# Altium PCB TVC Flight Computer.PcbDoc
Units mil, origin at the board's own origin, x right, y up, seen from the top; angles counter-clockwise.
Board outline 1480 x 1480 mil, 4 copper layers (Top Layer, Plane (GND), Plane (VCC), Bottom Layer), stack 62.992 mil thick; 32 components, 27 nets, 201 pads, 42 vias.
Unrouted connection lines stored in the file: 2.
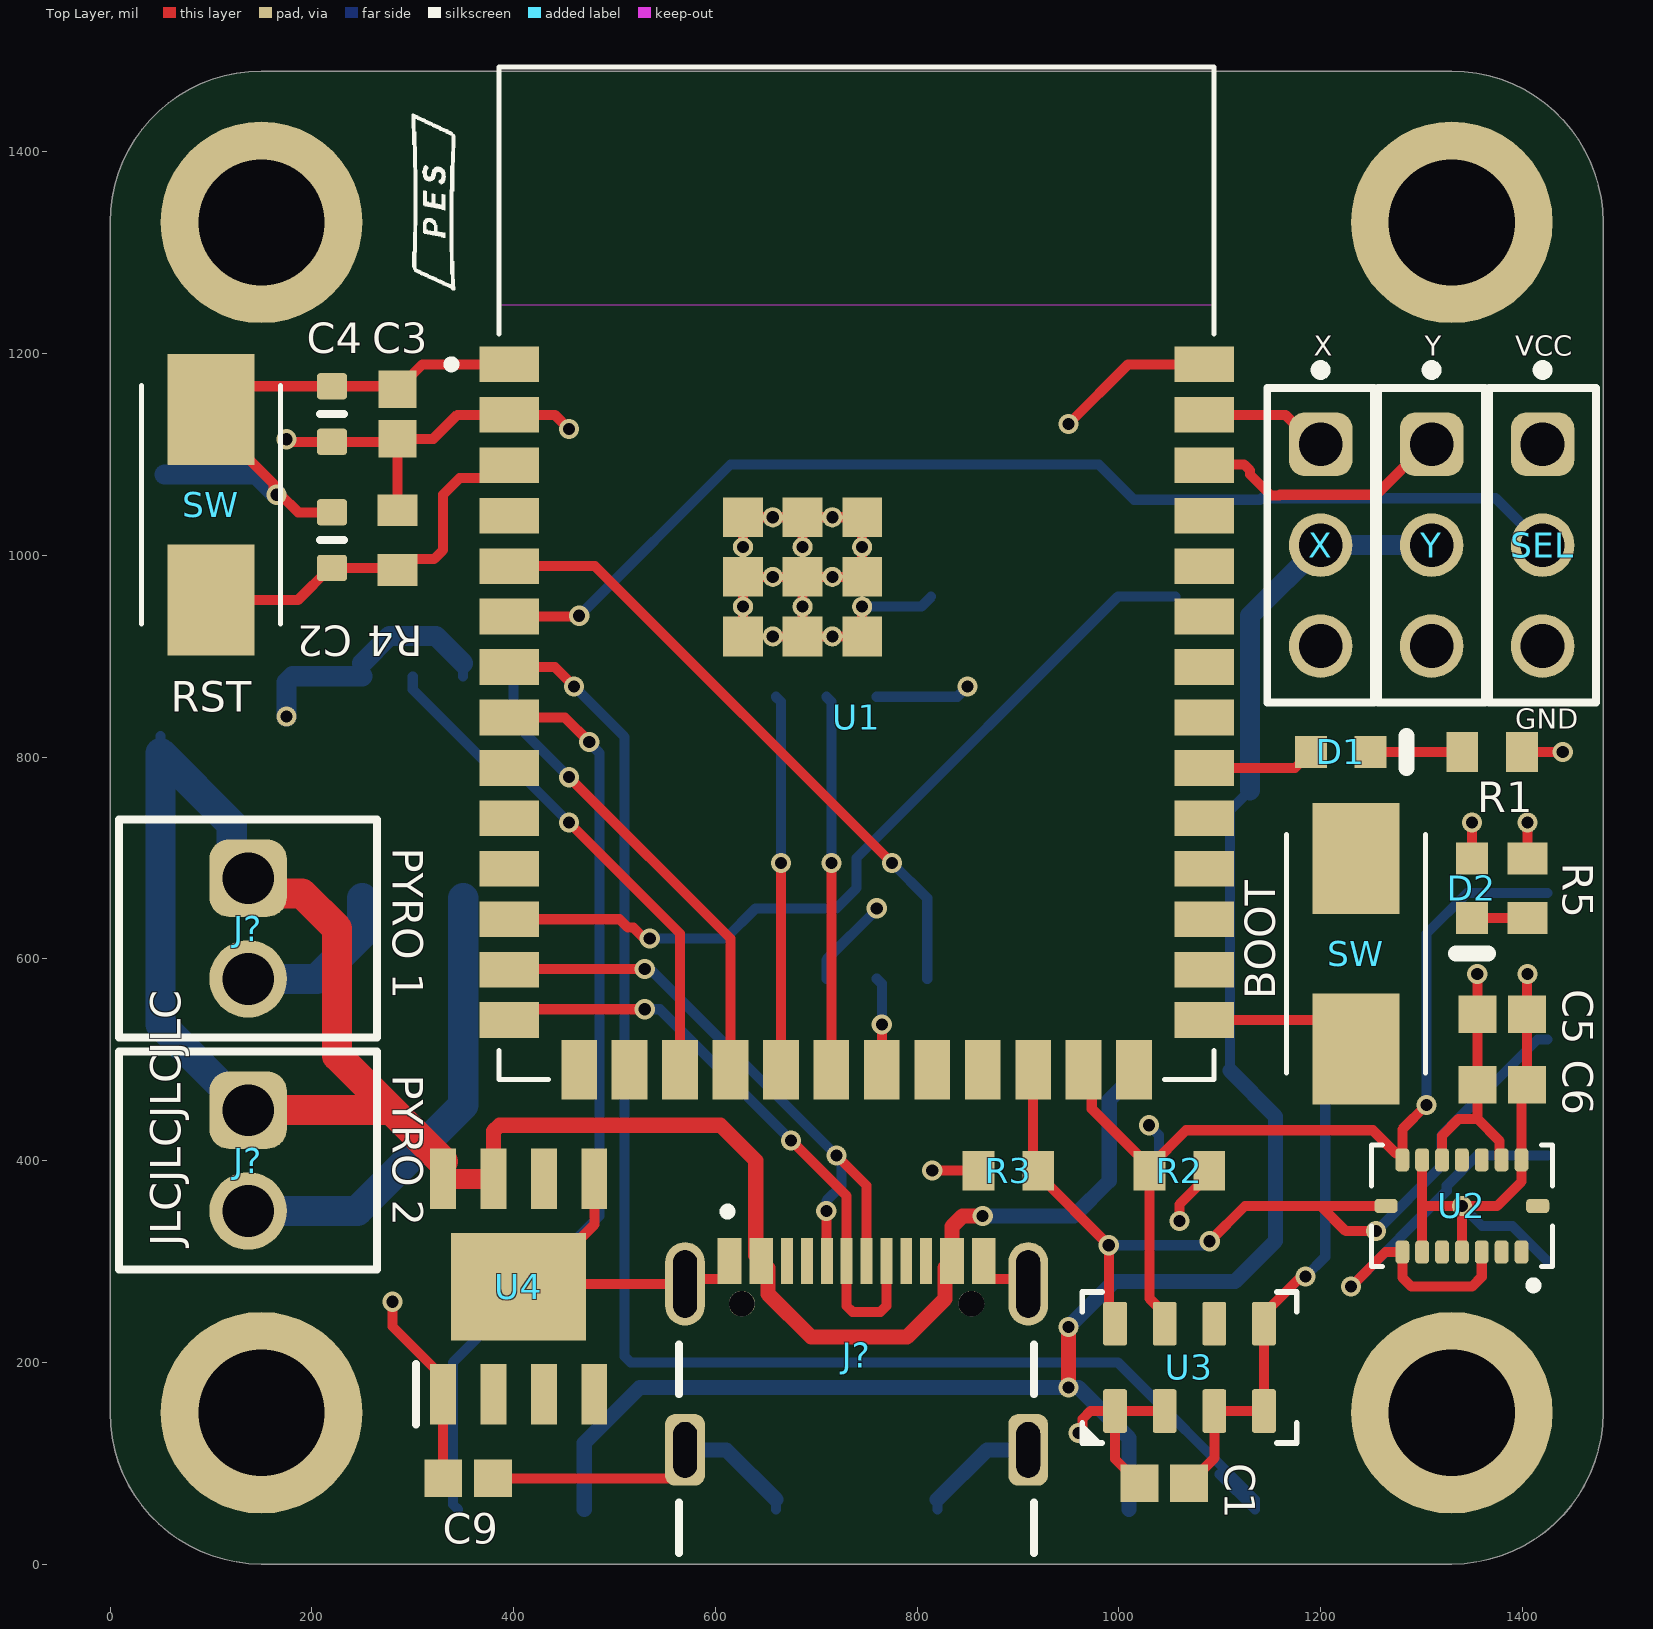
[diagram p0: Top Layer view]
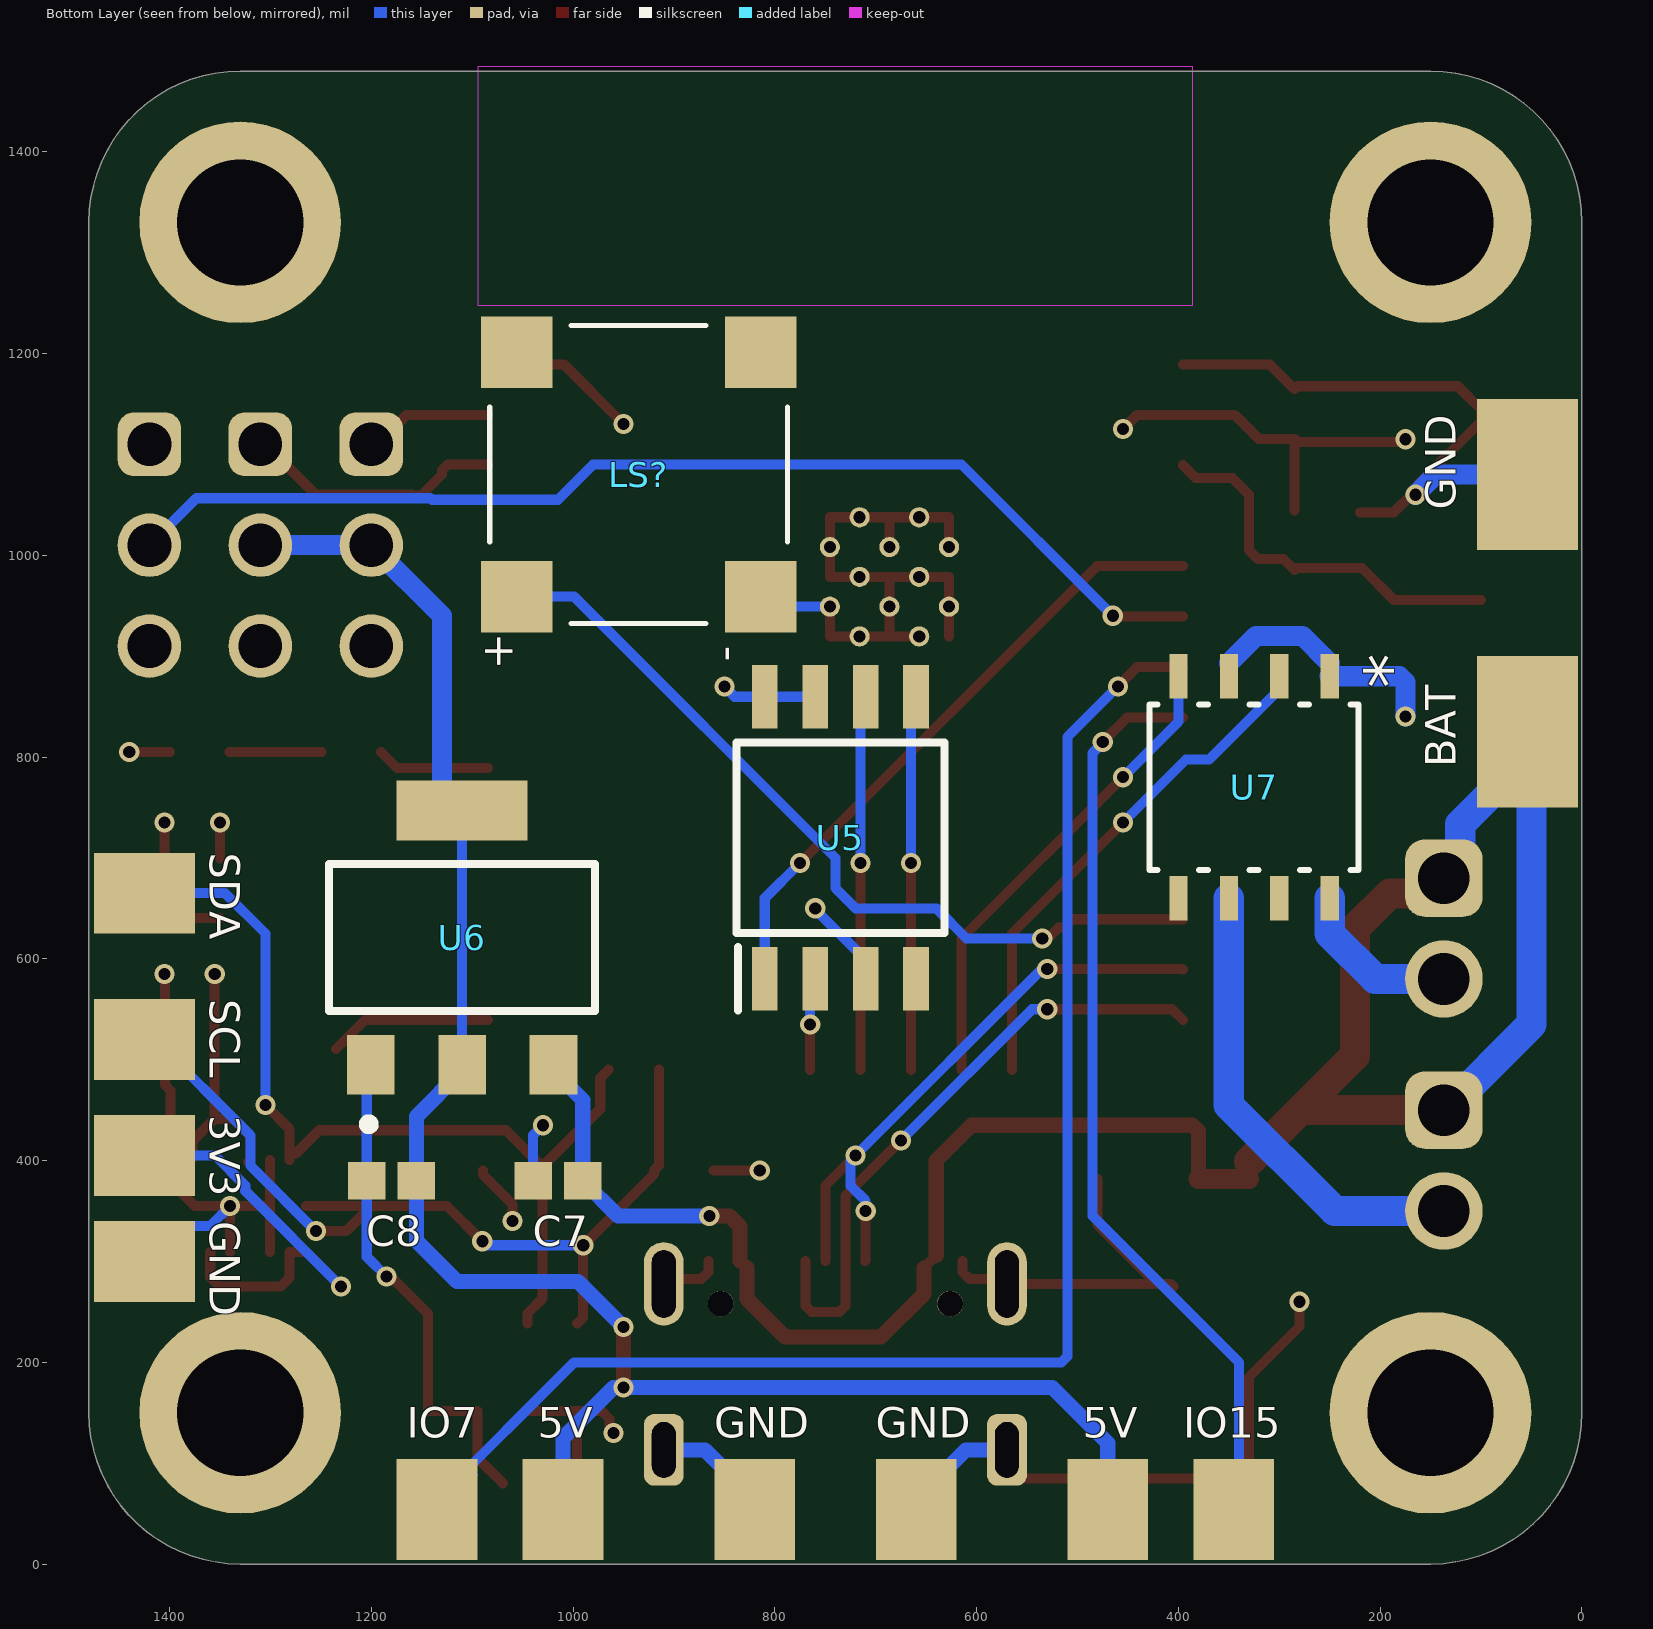
[diagram p1: Bottom Layer view, seen from below]
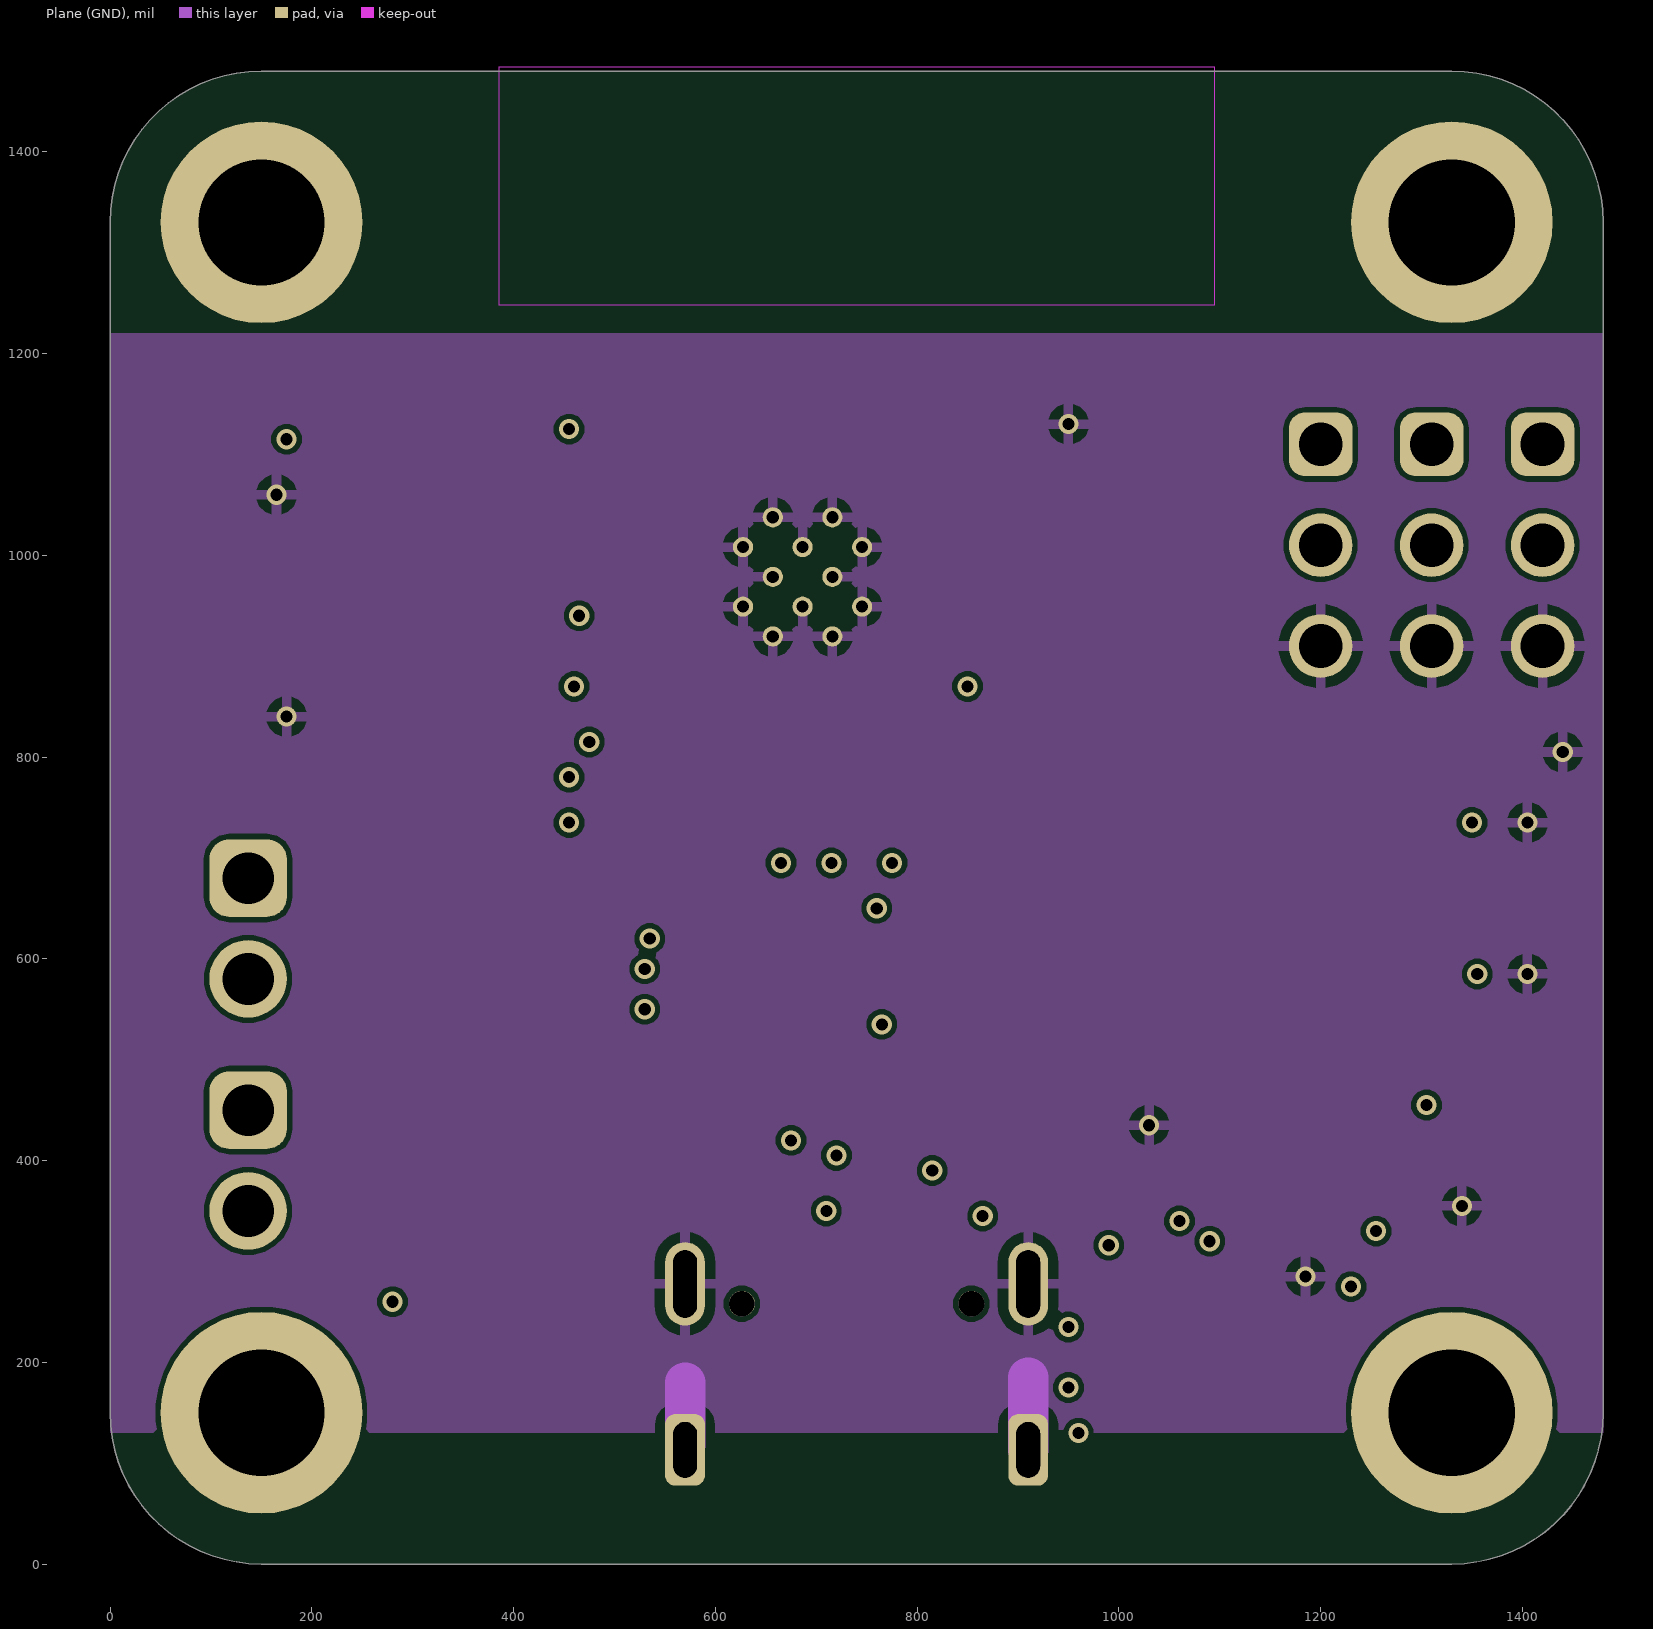
[diagram p2: Plane (GND)]
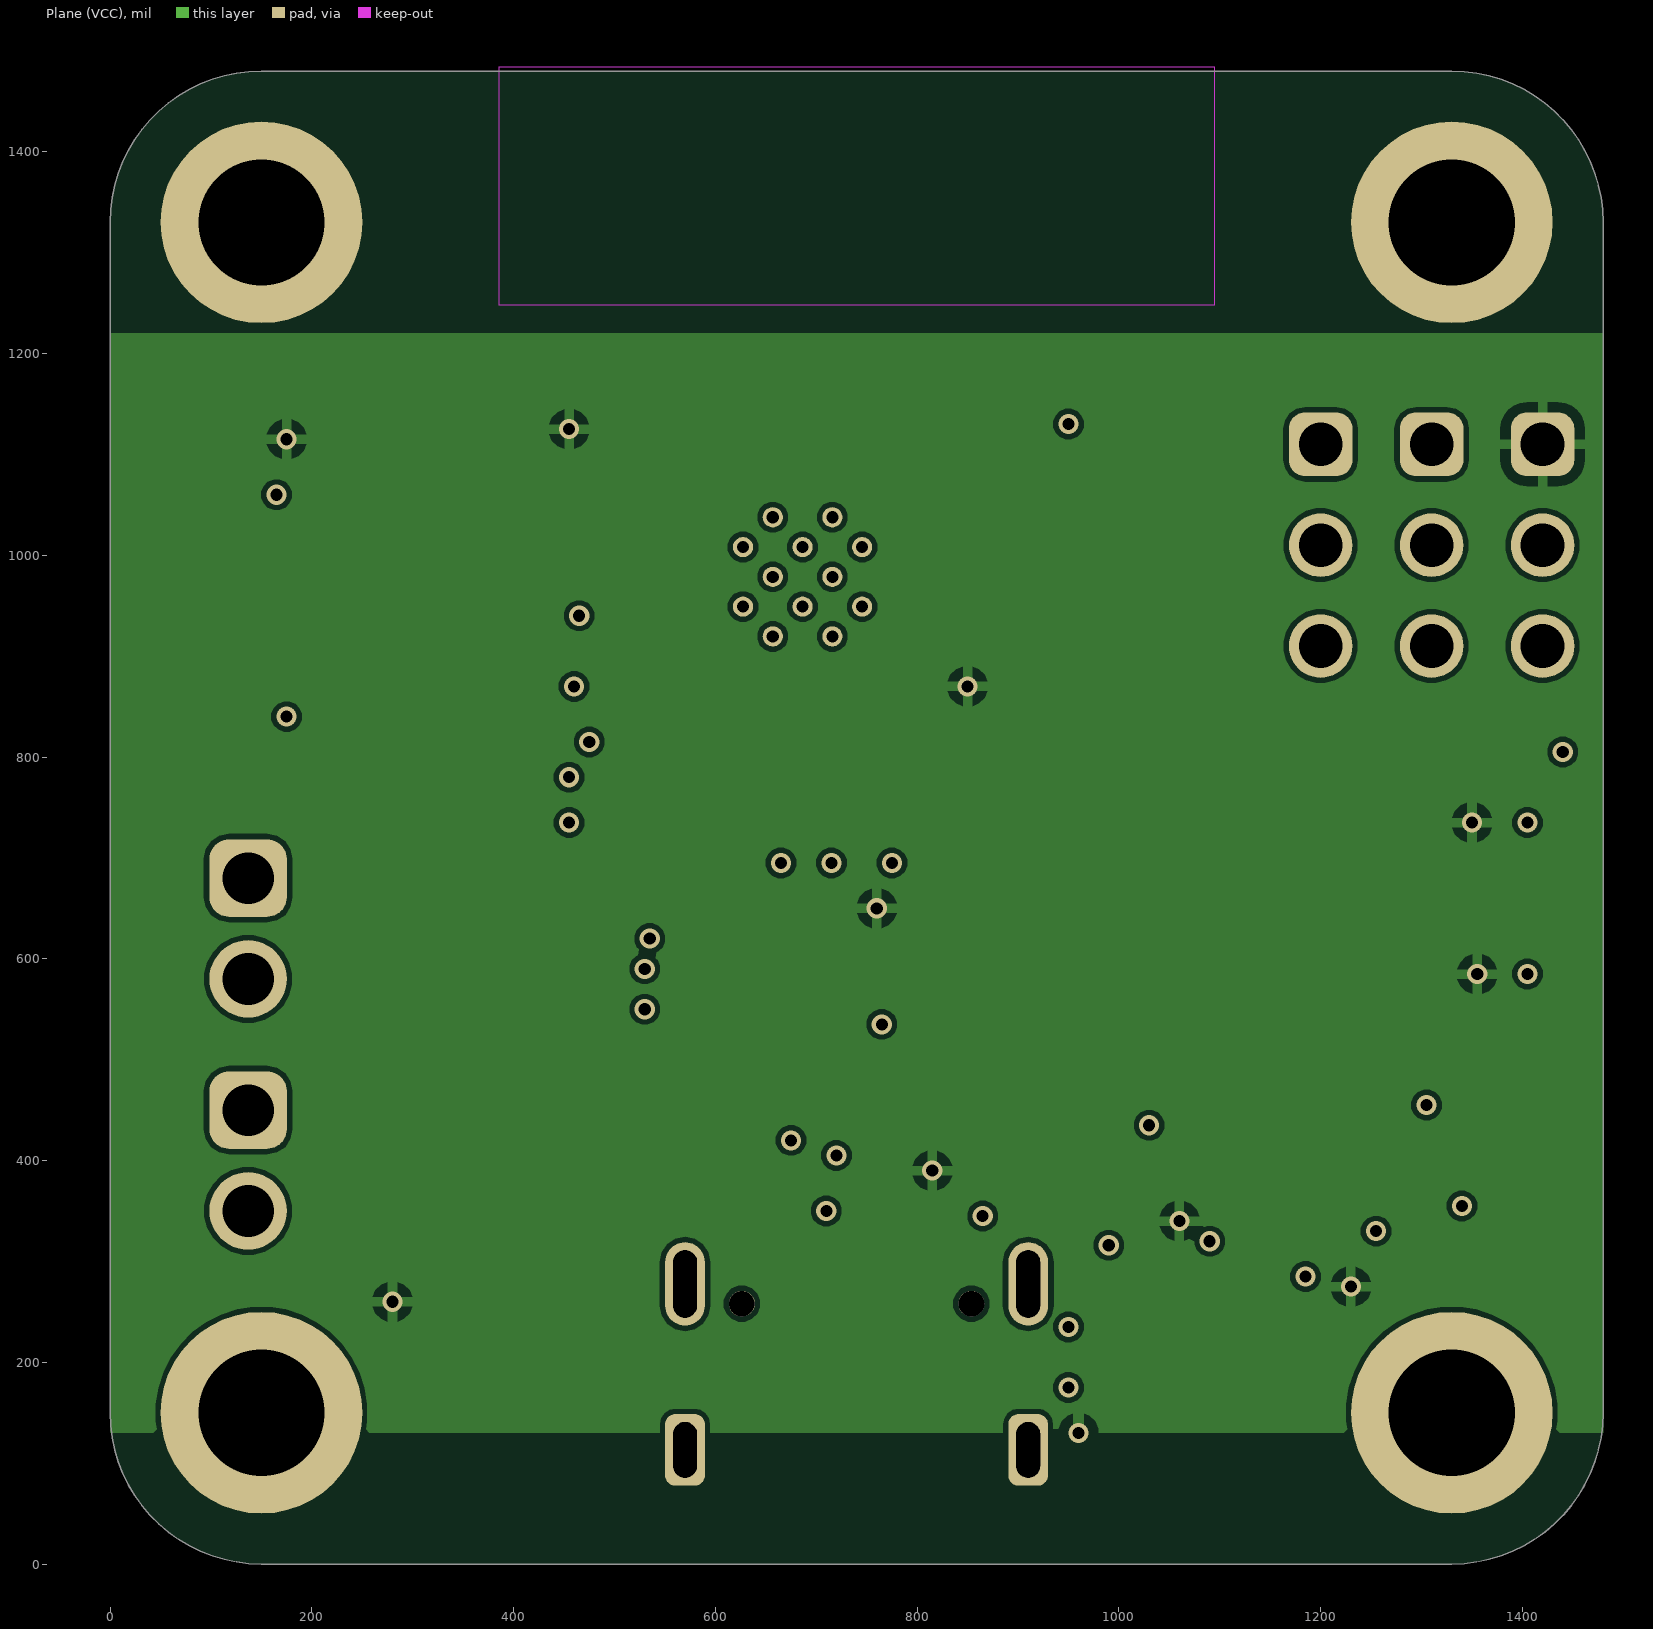
[diagram p3: Plane (VCC)]
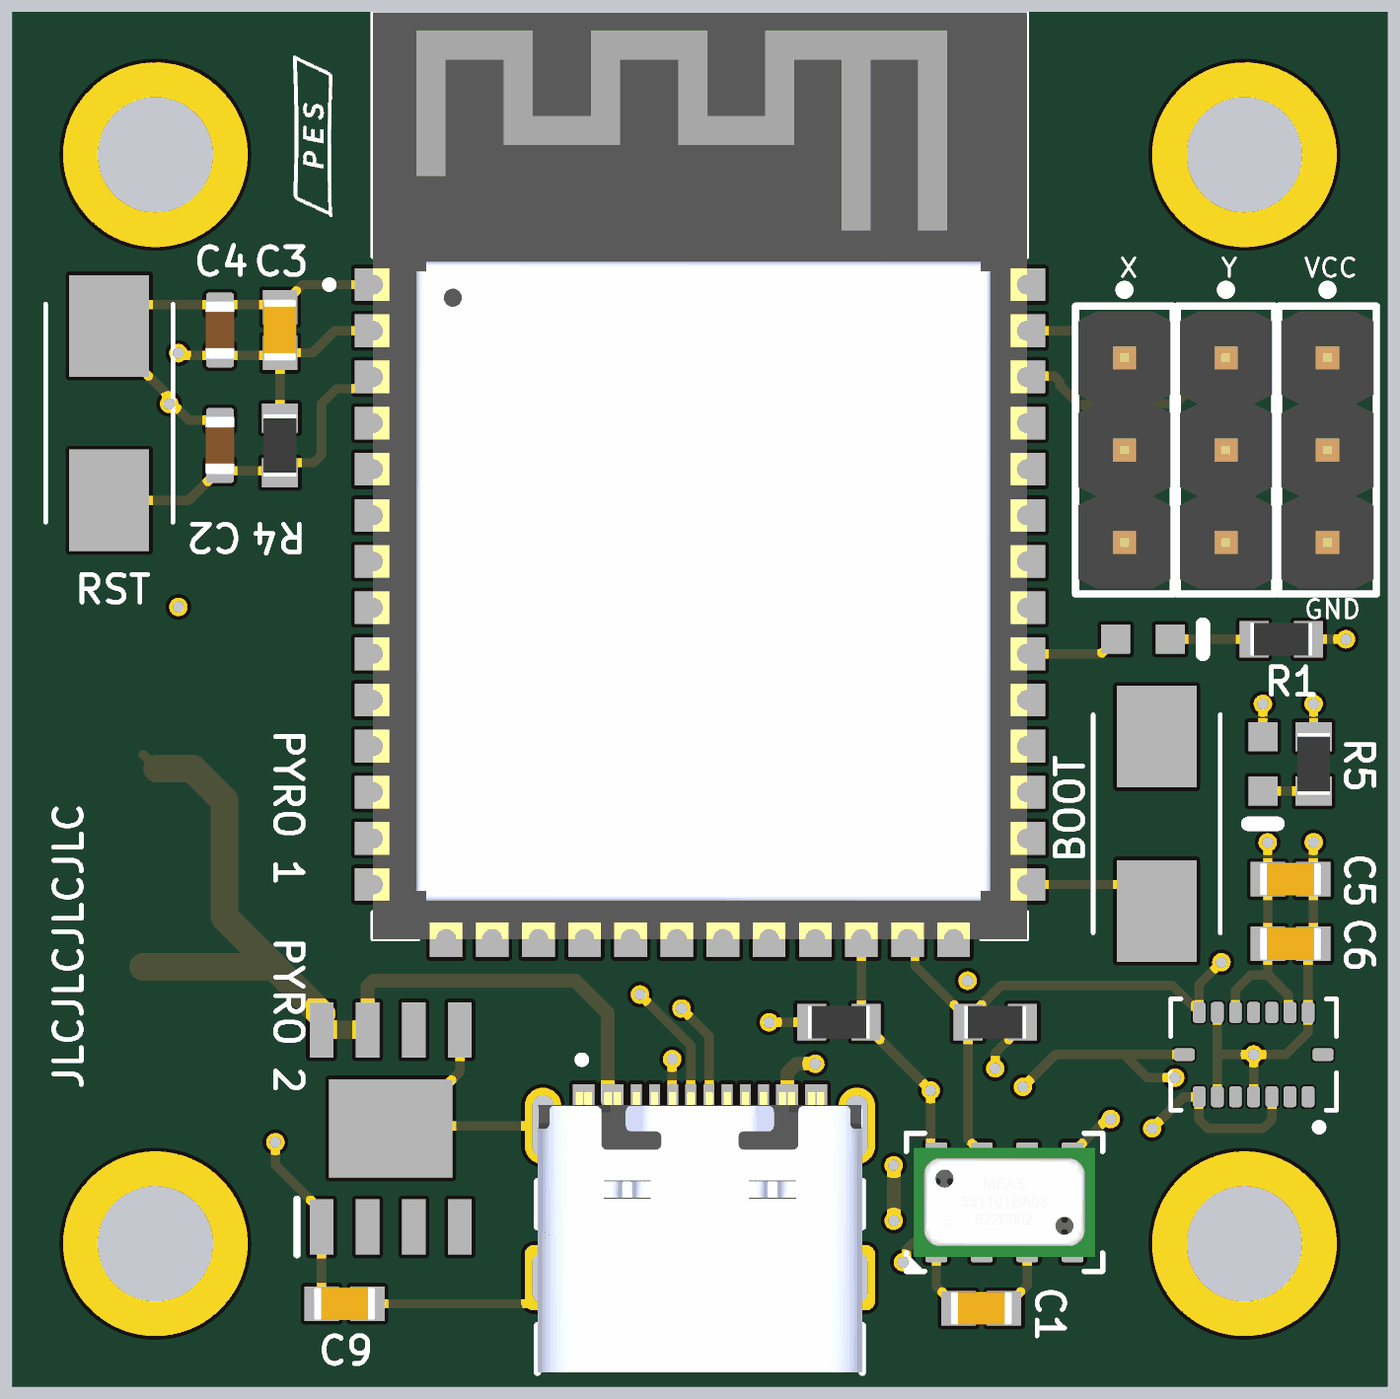
[diagram p4: 3D render of the assembled board from above, using the file's embedded part models]
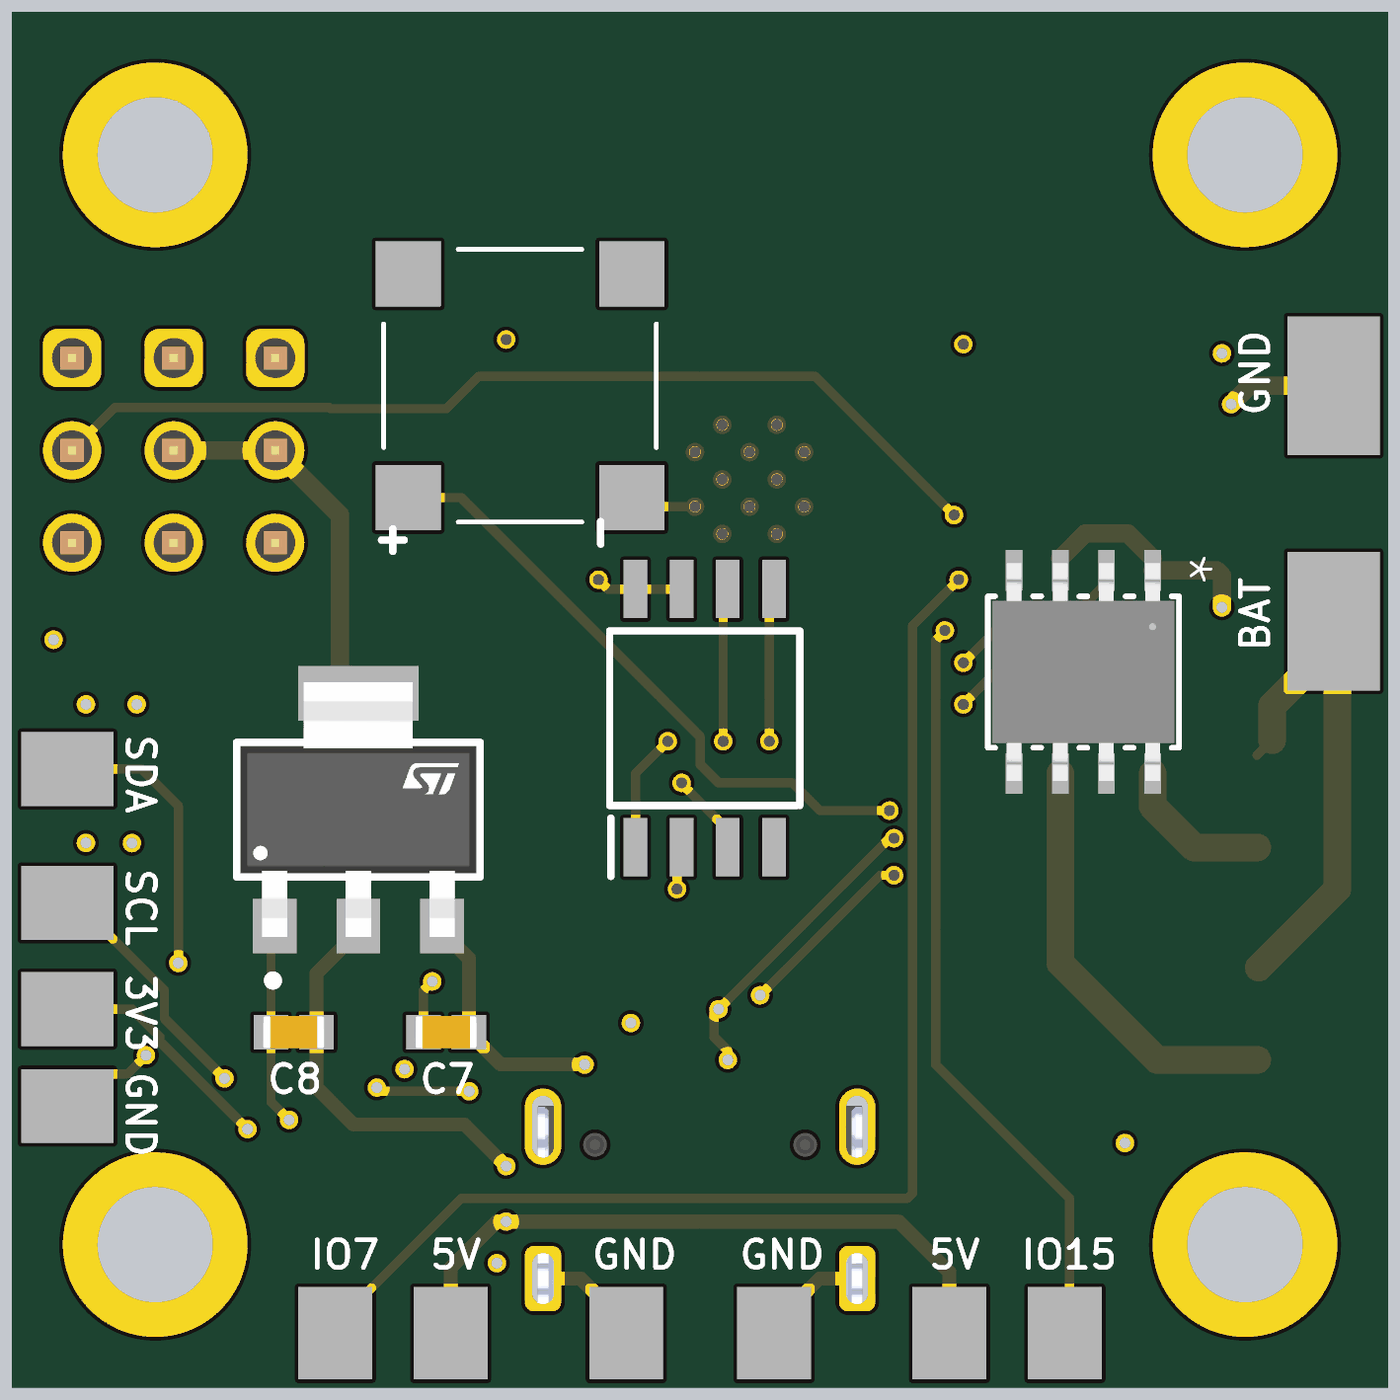
[diagram p5: 3D render of the assembled board from below, using the file's embedded part models]

## Layer stack, top to bottom
Top Solder: solder mask 0.4, Solder Resist, Dk 3.5
Top Layer: signal copper 1.378
Dielectric 2: prepreg 8.28, PP-006, Dk 4.1
Plane (GND): signal copper 1.378
Dielectric 1: prepreg 40.9201, PP-006, Dk 4.1
Plane (VCC): signal copper 1.378
Dielectric 3: prepreg 8.28, PP-006, Dk 4.1
Bottom Layer: signal copper 1.378
Bottom Solder: solder mask 0.4, Solder Resist, Dk 3.5

## Board outline
150,0 cw(c150,150) 0,150 0,1330 cw(c150,1330) 150,1480 1330,1480 cw(c1330,1330) 1480,1330 1480,150 cw(c1330,150) 1330,0

## Design rules (kind name [scope] priority, off if disabled: settings)
Clearance Clearance_1 [(ExistsOnLayer('Plane (GND)') Or ExistsOnLayer('Plane (VCC)')) vs (ExistsOnLayer('Plane (GND)') Or ExistsOnLayer('Plane (VCC)'))] p1: gap=5 ignorepadtopadclearanceinfootprint=FALSE sourcerule=36 cellrowname=All cellrowtype=0 cellcolname=All cellcoltype=0 innerlayers=TRUE
Clearance Clearance_2 [(ExistsOnLayer('Top Layer') Or ExistsOnLayer('Bottom Layer')) vs (ExistsOnLayer('Top Layer') Or ExistsOnLayer('Bottom Layer'))] p2: gap=5 ignorepadtopadclearanceinfootprint=FALSE sourcerule=36 cellrowname=All cellrowtype=0 cellcolname=All cellcoltype=0 outerlayers=TRUE
Clearance [All] p3: gap=10 ignorepadtopadclearanceinfootprint=FALSE ismatrix=TRUE
ComponentClearance [All] p1: gap=0 collisioncheckmode=3 verticalgap=10 showdistances=FALSE
PolygonConnect [All] p1: connectstyle=Relief reliefconductorwidth=10 reliefentries=4 polygonreliefangle="90 Angle" airgapwidth=10
RoutingVias [All] p1: holewidth=28 width=50 viastyle="Through Hole" minholewidth=28 minwidth=50 maxholewidth=28 maxwidth=50
SolderMaskExpansion [All] p1: expansion=4 istentingtop=FALSE
Width [All] p1: maxlimit=10 minlimit=10 preferedwidth=10
29 further rules are at their usual default settings.

## Classes and differential pairs
component class PowerScheme: C7 C8 C9 D2 J? R5 U4 U6 U7
component class "TVC Flight Computer": C1 C2 C3 C4 C5 C6 D1 LS? R1 R2 R3 R4 SEL SW U1 U2 U3 U5 X Y

## Components (designator, comment, footprint, x,y, rotation, side; value= is the part's Value field where it differs from the comment)
C1 "Capacitor 100 nF +/-10% 50 V 0603" CAPC1608X90X40NL10T20 1045,80 r180 top value=100nF
C2 "Capacitor 1µF +/-40% 50V 0603" CAPC0603(1608)100_L 220,1015 r90 top value=1µF
C3 "Capacitor 100 nF +/-10% 50 V 0603" CAPC1608X90X40NL10T20 285,1140 r90 top value=100nF
C4 "Capacitor 10µF +/-20% 10V 0603" CAPC0603(1608)100_L 220,1140 r90 top value=10µF
C5 "Capacitor 100 nF +/-10% 50 V 0603" CAPC1608X90X40NL10T20 1380,545 r180 top value=100nF
C6 "Capacitor 100 nF +/-10% 50 V 0603" CAPC1608X90X40NL10T20 1380,475 r180 top value=100nF
C7 "Capacitor 100 nF +/-10% 50 V 0603" CAPC1608X90X40NL10T20 1015,380 r180 bottom value=100nF
C8 "Capacitor 100 nF +/-10% 50 V 0603" CAPC1608X90X40NL10T20 1180,380 r180 bottom value=100nF
C9 "Capacitor 100 nF +/-10% 50 V 0603" CAPC1608X90X40NL10T20 355,85 r180 top value=100nF
D1 "LTST-C190TBKT" LTST-C190TBKT-2_V 1220,805 r0 top
D2 "HSMW-C191" AVAG-HSMW-C191_V 1350,670 r270 top
J? "USB4105-GF-A" GCT_USB4105-GF-A 740,113.19 r0 top
J? "691210910002" 691210910002 50136.81,-49370 r270 top
J? "691210910002" 691210910002 50136.81,-49600 r270 top
LS? "CMT-7525-80-SMT-TR" XDCR_CMT-7525-80-SMT-TR 935,1080 r90 bottom
R1 "Resistor 1k +/-1% 0603 100 mW" RESC1608X55X25ML10T15 1370,805 r0 top value=1k
R2 "Resistor 10k +/-1% 0603 100 mW" RESC1608X55X25ML10T15 1060,390 r0 top value=10k
R3 "Resistor 10k +/-1% 0603 100 mW" RESC1608X55X25ML10T15 890.47,390 r180 top value=10k
R4 "Resistor 10k +/-1% 0603 100 mW" RESC1608X55X25ML10T15 285,1015 r270 top value=10k
R5 "Resistor 1k +/-1% 0603 100 mW" RESC1608X55X25ML10T15 1405,670 r90 top value=1k
SEL "61300311121" 61300311121 1420,1010 r270 top
SW "147873-1" SW_147873-1 1235,605 r90 top
SW "147873-1" SW_147873-1 100,1050 r90 top
U1 "ESP32-S3-WROOM-2-N32R8V" XCVR_ESP32-S3-WROOM-2-N32R8V 740,982.13 r0 top (schematic designator U?)
U2 "BMI085" PQFN50P450X300X100-16N 1340,355 r180 top
U3 "MS561101BA03-50" TECO-MS561101BA03_V 1070,195 r90 top
U4 "TPS7B8633BQDDARQ1" SOIC127P600X170-9N 405,275 r90 top
U5 "W25Q128JVSIQ_TR" SOIC127P780X195-8N 735,720 r90 bottom
U6 "LDL1117S50R" FP-SOT-223-0046067_14-MFG 1110,620.98 r90 bottom
U7 "SP8K2TB" TRANS_RSH065N_ROM 325,770 r270 bottom
X "61300311121" 61300311121 1200,1010 r270 top
Y "61300311121" 61300311121 1310,1010 r270 top

## Footprints (in the part's own frame and the unit in brackets; to place one, negate y for a bottom-side part, rotate by r counter-clockwise, add the part's x,y. Pads: shape width x height; smd on the part's side, far side on the other; paste and mask are expansions set on the pad)
61300311121 [mm] "Pin Header, pitch 2.54 mm, THT, Vertical, single row, 3p"
  rrect50% 1.6x1.6 hole 1.1: 1(-2.54,0)
  round 1.6 hole 1.1: 2(0,0) 3(2.54,0)
  silkscreen extent -4.53,-1.35 3.96,1.35, body extent -3.81,-1.27 3.81,1.27, height 8.57
691210910002 [mm] "2,54mm - modular - green - Horizontal wire entry - Cage clamp - 0,8mm2 wires - 02p"
  rrect50% 1.95x1.95 hole 1.3: 1(-1271.27,-1270)
  round 1.95 hole 1.3: 2(-1268.73,-1270)
  silkscreen extent -1272.74,-1273.25 -1267.26,-1266.75, body extent -1272.74,-1273.25 -1267.26,-1266.75, height 8.55
AVAG-HSMW-C191_V [mm] "SMD, 2-Leads, Body 1.6x0.8mm"
  rect 0.8x0.8 smd: 1(-0.75,0) 2(0.75,0)
  silkscreen extent 1.65,-0.4 1.65,0.4, body extent -0.8,-0.4 0.8,0.4, height 0.7
CAPC0603(1608)100_L [mm] "Chip Capacitor, Body 1.6x0.8mm, Height 1.0mm, IPC High Density"
  rrect25% 0.66x0.76 smd: 1(-0.7,0) 2(0.7,0)
  silkscreen extent 0,-0.3 0,0.3, body extent -0.8,-0.4 0.8,0.4, height 0.95
CAPC1608X90X40NL10T20 [mm] "Chip Capacitor, 2-Leads, Body 1.70x0.90mm, IPC Medium Density"
  rect 0.95x0.95 smd: 1(-0.625,0) 2(0.625,0)
  body extent -0.85,-0.45 0.85,0.45, height 0.9
FP-SOT-223-0046067_14-MFG [mm]
  rect 1.5x1.2 smd paste+0 mask+0: 1(-3.2,2.3) 2(-3.2,0) 3(-3.2,-2.3)
  rect 1.5x3.3 smd paste+0 mask+0: 4(3.2,0)
  silkscreen extent -4.82,-3.35 1.85,3.35, body extent -3.5,-3.25 3.5,3.25, height 1.9
GCT_USB4105-GF-A [mm]
  rect 0.6x1.15 smd: A1_B12(-3.2,4.755) A4_B9(-2.4,4.755) B1_A12(3.2,4.755) B4_A9(2.4,4.755)
  rect 0.3x1.15 smd: A5(-1.25,4.755) A6(-0.25,4.755) A7(0.25,4.755) A8(1.25,4.755) B5(1.75,4.755) B6(0.75,4.755) B7(-0.75,4.755) B8(-1.75,4.755)
  oval 1x2.1 hole 0.6 slot 1.7 at 90 deg: SH1(-4.32,4.18) SH2(4.32,4.18)
  rrect50% 1x1.8 hole 0.6 slot 1.4 at 90 deg: SH3(-4.32,0) SH4(4.32,0)
  round 0.65 hole 0.65 unplated: ""(-2.89,3.68) ""(2.89,3.68)
  silkscreen extent -4.47,-2.6 4.47,6.1, body extent -4.47,-2.6 4.47,5.11, height 3.31
LTST-C190TBKT-2_V [mm] "SMD, 2-Leads, Body 1.6x0.8mm"
  rect 0.8x0.8 smd: 1(-0.75,0) 2(0.75,0)
  silkscreen extent 1.65,-0.4 1.65,0.4, body extent -0.8,-0.4 0.8,0.4, height 0.8
PQFN50P450X300X100-16N [mm]
  rrect50% 0.35x0.58 smd mask+0: 1(-1.5,1.16) 2(-1,1.16) 3(-0.5,1.16) 4(0,1.16) 5(0.5,1.16) 6(1,1.16) 7(1.5,1.16) 9(1.5,-1.16) 10(1,-1.16) 11(0.5,-1.16) 12(0,-1.16) 13(-0.5,-1.16) 14(-1,-1.16) 15(-1.5,-1.16)
  rrect50% 0.58x0.35 smd mask+0: 8(1.91,0) 16(-1.91,0)
  silkscreen extent -2.28,-1.53 2.28,2.1
RESC1608X55X25ML10T15 [mm] "Chip Resistor, 2-Leads, Body 1.70x0.90mm, IPC Low Density"
  rect 0.8x1 smd: 1(-0.75,0) 2(0.75,0)
  body extent -0.85,-0.45 0.85,0.45, height 0.55
SOIC127P600X170-9N [mm]
  rect 1.525x0.65 smd: 1(-2.712,1.905) 2(-2.712,0.635) 3(-2.712,-0.635) 4(-2.712,-1.905) 5(2.712,-1.905) 6(2.712,-0.635) 7(2.712,0.635) 8(2.712,1.905)
  rect 2.71x3.4 smd: 9(0,0)
  silkscreen extent -3.47,2.58 -1.95,2.58
SOIC127P780X195-8N [mm]
  rect 1.6x0.65 smd: 1(-3.55,1.905) 2(-3.55,0.635) 3(-3.55,-0.635) 4(-3.55,-1.905) 5(3.55,-1.905) 6(3.55,-0.635) 7(3.55,0.635) 8(3.55,1.905)
  silkscreen extent -4.35,-2.62 2.4,2.62
SW_147873-1 [mm]
  rect 2.8x2.2 smd: 1(-2.4,0) 2(2.4,0)
  silkscreen extent -3,-1.75 3,1.75
TECO-MS561101BA03_V [mm] "SMD, 8-Leads, Body 3x5mm, Pitch 1.25mm"
  rrect20% 1.1x0.6 smd: 1(-1.1,1.875) 2(-1.1,0.625) 3(-1.1,-0.625) 4(-1.1,-1.875) 5(1.1,-1.875) 6(1.1,-0.625) 7(1.1,0.625) 8(1.1,1.875)
  silkscreen extent -1.9,-2.7 1.9,2.7, body extent -1.5,-2.5 1.5,2.5, height 0.73
TRANS_RSH065N_ROM [mil]
  rect 44x18 smd paste+0 mask+0: 1(-110,75) 2(-110,25) 3(-110,-25) 4(-110,-75) 5(110,-75) 6(110,-25) 7(110,25) 8(110,75)
  silkscreen extent -82,-104 82,104, body extent -118,-99 118,99, height 69
XCVR_ESP32-S3-WROOM-2-N32R8V [mm]
  rect 1.5x0.9 smd: 1(-8.75,5.26) 2(-8.75,3.99) 3(-8.75,2.72) 4(-8.75,1.45) 5(-8.75,0.18) 6(-8.75,-1.09) 7(-8.75,-2.36) 8(-8.75,-3.63) 9(-8.75,-4.9) 10(-8.75,-6.17) 11(-8.75,-7.44) 12(-8.75,-8.71) 13(-8.75,-9.98) 14(-8.75,-11.25) 27(8.75,-11.25) 28(8.75,-9.98) 29(8.75,-8.71) 30(8.75,-7.44) 31(8.75,-6.17) 32(8.75,-4.9) 33(8.75,-3.63) 34(8.75,-2.36) 35(8.75,-1.09) 36(8.75,0.18) 37(8.75,1.45) 38(8.75,2.72) 39(8.75,3.99) 40(8.75,5.26)
  rect 0.9x1.5 smd: 15(-6.985,-12.5) 16(-5.715,-12.5) 17(-4.445,-12.5) 18(-3.175,-12.5) 19(-1.905,-12.5) 20(-0.635,-12.5) 21(0.635,-12.5) 22(1.905,-12.5) 23(3.175,-12.5) 24(4.445,-12.5) 25(5.715,-12.5) 26(6.985,-12.5)
  rect 1x1 smd: 41_1(-1.36,-0.09) 41_2(-2.86,-0.09) 41_3(0.14,-0.09) 41_4(-2.86,-1.59) 41_5(-1.36,-1.59) 41_6(0.14,-1.59) 41_7(-2.86,1.41) 41_8(-1.36,1.41) 41_9(0.14,1.41)
  round 0.508 hole 0.305 mask+0: 41_10(-1.36,0.66) 41_11(-2.86,0.66) 41_12(0.14,0.66) 41_13(-2.86,-0.84) 41_14(-1.36,-0.84) 41_15(0.14,-0.84) 41_16(-2.11,1.41) 41_17(-0.61,1.41) 41_18(-2.11,-0.09) 41_19(-0.61,-0.09) 41_20(-2.11,-1.59) 41_21(-0.61,-1.59)
  Keep-Out Layer region: 9,6.75 -9,6.75 -9,12.75 9,12.75
  Keep-Out Layer region: 9,6.75 -9,6.75 -9,12.75 9,12.75
  silkscreen extent -10.3,-12.75 9,12.75, body extent -9,-12.75 9,12.75, height 3.25
XDCR_CMT-7525-80-SMT-TR [mm]
  rect 1.8x1.8 smd: 1(3.075,3.075) 2(3.075,-3.075) N(-3.075,-3.075) P(-3.075,3.075)
  silkscreen extent -3.75,-3.75 3.75,3.75

## Part data
C1 C3 C5 C6 C7 C8 C9: library part CMP-001-00017-6, "Chip Capacitor, 100 nF, +/- 10%, 50 V, 0603 (1608 Metric)", Capacitor Type=Ceramic, Case/Package=0603, Max Operating Temperature=125°C, Min Operating Temperature=-55°C, Tolerance=10%, Voltage Rating=50V, Mounting Technology=SM, Pins=2, RoHS Compliant=True
C2: library part CMP-001-00078-4, "Chip Capacitor, 1µF +/-40%, 50V, 0603, Thickness 1 mm", Case/Package=0603, Max Operating Temperature=85°C, Min Operating Temperature=-55°C, Tolerance=10%, Voltage Rating=50V, Mounting Technology=SMT, Pins=2
C4: library part CMP-001-00075-4, "Chip Capacitor, 10µF +/-20%, 10V, 0603, Thickness 1 mm", Case/Package=0603, Max Operating Temperature=85°C, Min Operating Temperature=-55°C, Tolerance=10%, Voltage Rating=10V, Mounting Technology=SMT, Pins=2
D1: library part CMP-007-00026-2, "LED Uni-Color Blue, 76 mW, 20 mA, -20 to 80 degC, 2-Pin SMD, RoHS, Tape and Reel", Case/Package=0603, Colour=Blue, Forward Current=20mA, Forward Voltage=2.8V, Manufacturer=Lite-On, Max Operating Temperature=80°C, Min Operating Temperature=-20°C, Package Description="2-Pin Surface Mount Device, Body 1.6 x 0.8 mm", Package Quantity=3000, Package Reference=C190TBKT-2, Datasheet URL=http://optoelectronics.liteon.com/upload/download/DS-22-99-0224/S_110_LTST-C190TBKT(0630).pdf, Datasheet Version="Rev. K, 08/2011", Illumination Colour=Blue, Lens Style=Diffused, Luminous Intensity=28mcd, Manufacturer URL=http://www.us.liteon.com/, Mounting Technology=SM, Nominal Vf=3.3V, Packaging=TapeandReel, Pins=2, RoHS Compliant=True, Viewing Angle=130degrees
D2: library part CMP-007-00016-2, "LED Uni-Color White, 78 mW, 20 mA, -40 to 85 degC, 2-Pin SMD, RoHS, Tape and Reel", Case/Package=0603, Colour=White, Forward Current=20mA, Forward Voltage=3.6V, Manufacturer=Avago, Max Operating Temperature=85°C, Min Operating Temperature=-40°C, Package Description="2-Pin Surface Mount Device, Body 1.6 x 0.8 mm", Package Quantity=4000, Power=78mW, Datasheet URL=http://docs.avagotech.com/docs/AV02-0186EN, Datasheet Version=May-10, Illumination Colour=White, Lens Style=Diffused, Luminous Intensity=200mcd, Manufacturer URL=http://www.avagotech.com/, Mounting Technology=SM, Nominal Vf=3.6V, Package Reference=HSMW-C191, Packaging=TapeandReel, Pins=2, RoHS Compliant=True, Viewing Angle=140degrees
J?: library part CMP-002-00071-1, "USB-C (USB TYPE-C) USB 2.0 Receptacle Connector 24 (16+8 Dummy) Position Surface Mount, Right Angle; Through Hole", Case/Package=None, Check_prices=https://www.snapeda.com/parts/USB4105-GF-A/Global+Connector+Technology/view-part/?ref=eda, Component Type=Standard, Design Item ID=USB4105-GF-A, MF=GCT, MP=USB4105-GF-A, Pins=16, SnapEDA_Link=https://www.snapeda.com/parts/USB4105-GF-A/Global+Connector+Technology/view-part/?ref=snap, Source=USB4105-GF-A.SchLib
J? J?: library part CMP-002-00073-1, "Barrier Strip Terminal Block", RoHS Compliant=Yes
LS?: library part CMP-025-000000-1, "7.5 mm, 3.6 Vo-p, 80 dB, Surface Mount (SMT), Magnetic Audio Transducer Buzzer", Package="CUI Devices", Check_prices=https://www.snapeda.com/parts/CMT-7525-80-SMT-TR/CUI+Devices/view-part/?ref=eda, Component Type=Standard, CUI_purchase_URL=https://www.cuidevices.com/product/audio/buzzers/audio-transducers/cmt-7525-80-smt-tr?utm_source=snapeda.com&utm_medium=referral&utm_campaign=snapedaBOM, Design Item ID=CMT-7525-80-SMT-TR, Digi-Key_Part_Number=102-CMT-7525-80-SMT-TR-ND, MF="CUI Devices", MP=CMT-7525-80-SMT-TR, Pin Count=2, Purchase-URL=https://pricing.snapeda.com/search/part/CMT-7525-80-SMT-TR/?ref=eda, SnapEDA_Link=https://www.snapeda.com/parts/CMT-7525-80-SMT-TR/CUI+Devices/view-part/?ref=snap, Source=CMT-7525-80-SMT-TR.SchLib
R1 R5: library part CMP-009-00014-5, "Chip Resistor, 1 KOhm, +/-1%, 0.1 W, -55 to 155 degC, 0603 (1608 Metric)", Case/Package=0603, Max Operating Temperature=155°C, Min Operating Temperature=-55°C, Power=100mW, Tolerance=1%, Voltage Rating=50V, Mounting Technology=SM, Pins=2, RoHS Compliant=True
R2 R3 R4: library part CMP-009-00017-5, "Chip Resistor, 10 KOhm, +/- 1%, 01 W, -55 to 155 degC, 0603 (1608 Metric)", Case/Package=0603, Max Operating Temperature=155°C, Min Operating Temperature=-55°C, Power=100mW, Tolerance=1%, Voltage Rating=50V, Mounting Technology=SM, Pins=2, RoHS Compliant=True
SEL X Y: library part CMP-1502-01062-3, Color=Black, Contact Resistance=20mΩ, Current Rating=3A, Max Operating Temperature=105°C, Min Operating Temperature=-40°C, Operating Supply Voltage=250V, Connector Type="Male Pin", Contact Material=Copper, Contact Mating Length=5.9944mm, Contact Plating=Gold, Gender=Male, Height=8.94mm, Lead Free="Lead Free", Lead Pitch=2.54mm, Mount="Through Hole", NexarPartId=32855521, Number of Contacts=3, Number of Pins=3, Number of Positions=3, Number of Rows=1, Orientation=Vertical, Packaging=Bulk, Pitch=2.54mm, REACH SVHC=Unknown, RoHS=Compliant, Termination=Solder, Voltage Rating=250V
SW SW: library part CMP-011-00013-1, "Switch Tactile OFF (ON) SPST Rectangular Button J-Bend 0.05A 24VDC 1.77N SMD T/R", Case/Package=None, Availability=Unavailable, Component Type=Standard, Design Item ID=147873-1, MF="TE Connectivity", MP=147873-1, Pins=2, Price=None, SnapEDA_Link=https://www.snapeda.com/parts/147873-1/TE%20Connectivity%20ALCOSWITCH%20Switches/view-part/2549694/?ref=snap, Source=SnapEDAsch.SchLib
U1: library part CMP-027-000000-1, "Bluetooth, WiFi 802.11b/g/n, Bluetooth v5.0 Transceiver Module 2.4GHz PCB Trace Surface Mount", Package=None, Check_prices=https://www.snapeda.com/parts/ESP32-S3-WROOM-2-N32R8V/Espressif+Systems/view-part/?ref=eda, Component Type=Standard, Design Item ID=ESP32-S3-WROOM-2-N32R8V, MF="Espressif Systems", MP=ESP32-S3-WROOM-2-N32R8V, Pin Count=49, SnapEDA_Link=https://www.snapeda.com/parts/ESP32-S3-WROOM-2-N32R8V/Espressif+Systems/view-part/?ref=snap, Source=ESP32-S3-WROOM-2-N32R8V.SchLib
U2: library part CMP-011-000006-1, "Accelerometer, Gyroscope, 6 Axis Sensor IÂ²C, SPI Output", Package="VFLGA-16 Bosch Tools", Component Type=Standard, Design Item ID=BMI085, Digi-Key_Part_Number=828-1083-1-ND, Digi-Key_Purchase_URL=https://www.digikey.com/product-detail/en/bosch-sensortec/BMI085/828-1083-1-ND/8634943?utm_source=snapeda&utm_medium=aggregator&utm_campaign=symbol, MF="Bosch Sensortec", MP=BMI085, Pin Count=15, SnapEDA_Link=https://www.snapeda.com/parts/BMI085/Bosch%20Sensortec/view-part/2857155/?ref=snap, Source=SnapEDAsch.SchLib
U3: library part CMP-010-00021-3, "Barometric Pressure Sensor, 1.8 to 3.6 V, -40 to 85 degC, 8-Pin SMD, RoHS, Tape and Reel", Case/Package=LGA-8, Max Operating Temperature=85°C, Max Supply Voltage=3.6V, Min Operating Temperature=-40°C, Min Supply Voltage=1.8V, Mounting Technology=SMT, Pins=8, RoHS Compliant=Yes, Sensor Type=Barometer
U4: library part CMP-013-000000-1, "LDO Voltage Regulators Automotive 500-mA, 40-V, ultra-low-IQ, low-dropout (LDO) linear regulator with power good 8-SO PowerPAD -40 to 150", Manufacturer_Name="Texas Instruments", Mouser Part Number=595-PS7B8633BQDDARQ1, Datasheet Link=https://www.ti.com/general/docs/suppproductinfo.tsp?distId=26&gotoUrl=https://www.ti.com/lit/gpn/tps7b86-q1, Design Item ID=TPS7B8633BQDDARQ1, Geometry.Height=1.7mm, Manufacturer_Part_Number=TPS7B8633BQDDARQ1, Mouser Price/Stock=https://www.mouser.co.uk/ProductDetail/Texas-Instruments/TPS7B8633BQDDARQ1?qs=ulEaXIWI0c8jShQv7JB9Ew%3D%3D, Source=TPS7B8633BQDDARQ1.SchLib
U5: library part CMP-006-00021-1, "FLASH - NOR Memory IC 128Mb (16M x 8) SPI - Quad I/O 8-SOIC", Arrow Part Number="W25Q128JVSIQ TR", Manufacturer_Name=Winbond, Mouser Part Number=454-W25Q128JVSIQTR, Arrow Price/Stock=https://www.arrow.com/en/products/w25q128jvsiqtr/winbond-electronics?region=nac, Datasheet Link=http://www.winbond.com/resource-files/w25q128jv%20spi%20revc%2011162016.pdf, Design Item ID=W25Q128JVSIQ_TR, Geometry.Height=1.95mm, Manufacturer_Part_Number="W25Q128JVSIQ TR", Mouser Price/Stock=https://www.mouser.co.uk/ProductDetail/Winbond/W25Q128JVSIQ-TR?qs=qSfuJ%252Bfl%2Fd7vTyLA9kNdGw%3D%3D, Source=W25Q128JVSIQ_TR.SchLib
U6: library part CMP-019-00049-1, "Fixed Positive LDO Regulator, 5V, 0.6V Dropout, PDSO4", Case/Package=SOP, Max Supply Voltage=18V, Pins=4, RoHS Compliant=Yes
U7: library part CMP-009-00177-1, "No Description Available", Mfr_Name="ROHM Semiconductor", Component Type=Standard, Design Item ID=SP8K2TB, Digi-Key_Part_Number_1=SP8K2TBCT-ND, Digi-Key_Part_Number_2=SP8K2TBDKR-ND, Digi-Key_Part_Number_3=SP8K2TBTR-ND, Pins=8, RefDes=RefDes, Source=SP8K2TB.SchLib, Type=Type

## Free pads (board coordinates)
  round 200 hole 125 unplated: 2(150,150) 2(150,1330) 2(1330,150) 2(1330,1330)
  rect 100x150 smd far side: 3(54,825) 4(54,1080)
  rect 80x100 smd far side: 5(1010,54) 6(820,54) 7(1135,54) 8(660,54) 9(470,54) 10(345,54)
  rect 100x80 smd far side: 7(1425,300) 7(1425,405) 7(1425,520) 7(1425,665)

## Via types
v1: diameter 20, hole 12, Top Layer to Bottom Layer, 42 vias

## Nets (pads, with @x,y where several pads share a name; then routed paths per layer and width w, separated by ;. In a path a pad name is that pad's centre, name@x,y a point inside that pad or via, vN(x,y) a via of type N, cw(c..) or ccw(c..) an arc to the next point about the centre after c; other vN are vias at no path point)
+5: C8.2 pad.5 pad.9 U6.2 U6.4 X.2 Y.2 | length 1876.9
  Top Layer w15: v1(950,175) v1(950,235)
  Bottom Layer w10: U6.2@1110,489.09 U6.2 U6.4 U6.4@1130,766.97
  Bottom Layer w15: pad.9 470,120 525,175 v1(950,175) 960,175 1010,125 pad.5 ; v1(950,235) 995,280 1115,280 1155.39,320.39 C8.2 1155.39,443.7 U6.2@1110,489.09
  Bottom Layer w20: U6.4@1130,766.97 1130,940 X.2 Y.2
BUZZ: LS?.P U1.12 | length 826.5
  Top Layer w10: U1.12 505,639.21 513.26,630.96 518.63,630.96 529.59,620 v1(535,620)
  Bottom Layer w10: v1(535,620) 610,620 640,650 720,650 740,670 740,700 998.94,958.94 LS?.P
CS: U1.5 U5.1 | length 630.6
  Top Layer w10: U1.5 480.79,989.21 v1(775,695)
  Bottom Layer w10: v1(775,695) 810,660 U5.1
DN: J?.A7 J?.B7 U1.13 | length 631.5
  Top Layer w10: U1.13 396.3,590 v1(530,590) ; v1(710,350) 710,300.87 J?.B7 ; v1(720,405) 749.84,375.16 J?.A7
  Bottom Layer w10: v1(530,590) 535,590 v1(720,405) 725,400 725,375 710,360 v1(710,350)
DP: J?.A6 J?.B6 U1.14 | length 613.8
  Top Layer w10: U1.14 406.3,550 v1(530,550) ; v1(675,420) 730.16,364.84 J?.A6 729.92,300.15 730,300.07 730,255.86 735.86,250 763.67,250 769.53,255.86 J?.B6
  Bottom Layer w10: v1(530,550) 545,550 v1(675,420)
EN: C2.1 R4.2 SW.1@100,955.51 U1.3 | length 384.7
  Top Layer w10: SW.1@100,955.51 186.11,955.51 218.04,987.44 C2.1 283.03,987.44 R4.2 295.75,996.22 321.22,996.22 330,1005 330,1060 346.5,1076.5 382.8,1076.5 U1.3
GATE: U1.17 U7.2 | length 513.2
  Top Layer w10: v1(455,735) 565,625 U1.17
  Bottom Layer w10: U7.2 300,867 369.5,797.5 392.5,797.5 v1(455,735)
GATE2: U1.18 U7.4 | length 479.1
  Top Layer w10: v1(455,780) 615,620 U1.18
  Bottom Layer w10: U7.4 400,835 v1(455,780)
GND: C1.1 C2.2 C3.2 C4.2 C5.1 C6.1 C7.1 C8.1 C9.1 J?.A1_B12 J?.B1_A12 J?.SH1 J?.SH2 J?.SH3 J?.SH4 LS?.N pad.4 pad.6 pad.7@1425,300 pad.8 R1.2 R5.2 SEL.3 SW.2 U1.1 U1.40 U1.41_1 U1.41_2 U1.41_3 U1.41_4 U1.41_5 U1.41_6 U1.41_7 U1.41_8 U1.41_9 U1.41_10 U1.41_11 U1.41_12 U1.41_13 U1.41_14 U1.41_15 U1.41_16 U1.41_17 U1.41_18 U1.41_19 U1.41_20 U1.41_21 U2.4 U2.6 U2.10 U2.15 U3.3 U3.4 U3.5 U4.5 U4.9 U5.4 U6.1 U7.1 U7.3 X.3 Y.3 | length 3923.2
  Top Layer w10: C2.2 186.45,1042.56 169.01,1060 v1(165,1060) 162.13,1062.87 162.13,1070.55 100,1132.68 100,1144.49 123.07,1167.56 C4.2 282.05,1167.56 C3.2 309.61,1189.21 U1.1 ; C9.1 554.86,85 569.92,100.06 J?.SH3 ; U4.9 407.76,277.76 U4.9@421.34,277.76 ; U4.5 480,336.42 U4.9@421.34,277.76 ; J?.A1_B12 614.02,289.57 607.2,282.76 574.92,282.76 J?.SH1 U4.9@421.34,277.76 ; U1.41_4 U1.41_13 U1.41_2 U1.41_18 U1.41_1 ; U1.41_11 U1.41_7 U1.41_16 U1.41_8 ; U1.41_20 U1.41_5 ; U1.41_10 U1.41_8 ; U1.41_15 U1.41_6 U1.41_21 U1.41_5 ; J?.B1_A12 865.98,289.57 872.8,282.76 905.08,282.76 J?.SH2 ; v1(950,1130) 1009.21,1189.21 U1.40 ; C1.1 1094.61,105 U3.3 U3.4 U3.5 1143.82,248.15 1180.67,285 v1(1185,285) ; U2.6 1300.63,355 ; U2.10 1300.63,355 ; U2.4 1340,352.81 v1@1337.82,355 ; R1.2 v1(1440,805) ; v1(1405,585) 1404.61,584.61 C5.1 C6.1 1399.06,469.45 U2.15 1399.06,379.06 1375,355 v1@1337.82,355 ; R5.2 v1(1405,735) ; U1.41_5 U1.41_14 U1.41_1 ; U1.41_1 U1.41_19 U1.41_3 U1.41_12 U1.41_9 U1.41_17 U1.41_8 ; 1300.63,355 v1@1337.82,355
  Plane (GND) w10: J?.SH3 564.92,113.19 J?.SH3@570,118.27 ; 910,185 910.08,184.92
  Plane (GND) w40: J?.SH3@570,118.27 570,180 ; J?.SH4 910.08,184.92
  Bottom Layer w10: U7.1 U7.1@250,893 ; U7.3 U7.3@350,893 ; J?.SH3 J?.SH3@584.11,99 ; pad.8 pad.8@660,64 ; U1.41_15 804.06,949.06 LS?.N ; pad.6 pad.6@820,64 ; v1(1030,435) 1039.61,425.39 C7.1 ; v1(1185,285) 1204.61,304.61 C8.1 1204.61,490.94 U6.1 ; v1(1340,355) 1360,335 1390,335 pad.7@1425,300
  Bottom Layer w15: J?.SH3 610.81,113.19 pad.8@660,64 ; pad.6@820,64 869.19,113.19 J?.SH4
  Bottom Layer w20: pad.4 145,1080 v1(165,1060) ; v1(175,840) 175,874.14 180.86,880 U7.1 ; U7.1@250,893 277,920 323,920 U7.3@350,893
GPIO7: pad.7@1135,54 U1.7 | length 1451.1
  Top Layer w10: U1.7 440.79,889.21 v1(460,870)
  Bottom Layer w10: v1(460,870) 510,820 510,205.86 515.86,200 999,200 1135,64 pad.7@1135,54
GPIO15: pad.10 U1.8 | length 916.8
  Top Layer w10: U1.8 450.79,839.21 v1(475,815)
  Bottom Layer w10: pad.10 340,59 340,200 485,345 485,804.14 475,814.14 v1(475,815)
IO0: SW.1@1235,510.51 U1.27 | length 162.4
  Top Layer w10: U1.27 1206.3,539.21 SW.1@1235,510.51
MISO: U1.21 U5.2 | length 92.3
  Top Layer w10: U1.21 v1(765,535)
  Bottom Layer w10: U5.2 765,575.24 v1(765,535)
MOSI: U1.19 U5.5 | length 371.8
  Top Layer w10: U1.19 v1(665,695)
  Bottom Layer w10: U5.5 665,854.76 v1(665,695)
NetD1_1: D1.1 U1.32 | length 112.5
  Top Layer w10: U1.32 1174.68,789.21 D1.1
NetD1_2: D1.2 R1.1 | length 90.9
  Top Layer w10: D1.2 R1.1
NetD2_2: D2.2 R5.1 | length 55
  Top Layer w10: D2.2 R5.1
PYRO: J?.2@136.81,580 U7.8 | length 166.8
  Bottom Layer w30: J?.2@136.81,580 205,580 250,625 U7.8
PYRO2: J?.2@136.81,350 U7.6 | length 461.7
  Bottom Layer w30: J?.2@136.81,350 245,350 350,455 U7.6
SCK: U1.20 U5.6 | length 371.8
  Top Layer w10: U1.20 v1(715,695)
  Bottom Layer w10: U5.6 715,854.76 v1(715,695)
SCL: pad.7@1425,520 R3.1 U1.24 U2.8 U3.8 | length 907.9
  Top Layer w10: U1.24 915,395 R3.1 920,386.06 v1(990,316.06) 990,244.49 U3.8 ; v1(1090,320) 1125,355 1200,355 ; v1(1255,330) 1225,330 1200,355 ; U2.8 1200,355
  Bottom Layer w10: v1(990,316.06) 1086.06,316.06 v1(1090,320) ; v1(1255,330) 1320,395 1320,425 1415,520 pad.7@1425,520
SDA: pad.7@1425,665 R2.1 U1.25 U2.9 U3.7 | length 931.3
  Top Layer w10: U1.25 973.08,481.92 973.08,451.33 R2.1@1030.47,393.94 ; U3.7@1045.2,238.5 1045.2,248.35 1030.47,263.07 R2.1 R2.1@1030.47,393.94 ; U2.9 U2.9@1280.94,405.2 ; v1(1305,455) 1280.94,430.94 U2.9@1280.94,405.2 ; R2.1@1030.47,393.94 1066.54,430 1251.61,430 1274.53,407.09 1279.06,407.09 U2.9@1280.94,405.2
  Bottom Layer w10: v1(1305,455) 1305,625 1345,665 pad.7@1425,665
SELECT: SEL.2 U1.6 | length 1121.3
  Top Layer w10: U1.6 464.21,939.21 v1(465,940)
  Bottom Layer w10: v1(465,940) 615,1090 980,1090 1015,1055 1140,1055 1141.5,1056.5 1373.5,1056.5 SEL.2
ServoX: U1.39 X.1 | length 127.6
  Top Layer w10: U1.39 1164.97,1139.21 1194.18,1110 X.1
ServoY: U1.38 Y.1 | length 262.1
  Top Layer w10: U1.38 1085.28,1090 1124.14,1090 1130,1084.14 1130,1080 1150.86,1059.14 1159.14,1059.14 1160,1060 1255,1060 1305,1110 Y.1
VCC: C1.2 C3.1 C4.1 C5.2 C6.2 C9.2 D2.1 pad.7@1425,405 R2.2 R3.2 R4.1 SEL.1 U1.2 U2.3 U2.7 U2.11 U2.14 U3.1 U3.2 U4.1 U5.3 U5.7 U5.8 | length 1791.5
  Top Layer w10: v1(175,1115) 177.56,1112.44 C4.1 282.05,1112.44 C3.1 ; v1(280,260) 280,235.45 330,185.45 U4.1 330,85.39 C9.2 ; R4.1 C3.1 ; v1(455,1125) 440.79,1139.21 U1.2 344.21,1139.21 320.39,1115.39 C3.1 ; v1(815,390) R3.2 ; v1(960,130) 963.83,133.83 963.83,143.83 971.69,151.69 U3.1 ; C1.2 996.18,104.21 U3.1 ; U3.2 U3.1 ; v1(1060,340) 1060,356.54 1089.53,386.06 R2.2 ; v1(1230,275) 1264.33,309.33 U2.7 1280.94,284.06 1290,275 1350,275 1359.68,284.69 U2.3 ; U2.11@1322.2,398.78 U2.11 1320.32,424.69 1336.93,441.3 1355.39,441.3 ; D2.1 v1(1350,735) ; v1@1355,585 1355.39,584.61 C5.2 C6.2 1355.39,441.3 ; U2.14 1377.48,402.56 1377.48,419.21 1355.39,441.3
  Bottom Layer w10: U5.3 710,598.94 760,648.94 v1(760,650) ; U5.7 U5.8 839.76,859.76 v1(850,870) ; v1(1230,275) 1325,370 1325,375 1355,405 pad.7@1425,405
  other v1: 1355.2,584.8
VIN: C7.2 J?.1 J?.A4_B9 J?.B4_A9 pad.3 U4.7 U4.8 U6.3 | length 2207.6
  Top Layer w10: J?.1@136.81,680 J?.1@152.01,664.8 ; U4.8 U4.8@330,399 ; J?.A4_B9@640,305.91 J?.A4_B9 J?.A4_B9@652.32,293.58 ; J?.B4_A9@827.76,293.66 J?.B4_A9
  Top Layer w15: U4.7 380,429.14 385.86,435 605,435 640,400 J?.A4_B9@640,305.91 ; J?.A4_B9@652.32,293.58 652.32,267.68 695,225 790,225 827.76,262.76 J?.B4_A9@827.76,293.66 ; J?.B4_A9 834.49,334.49 845,345 v1(865,345)
  Top Layer w20: U4.8 U4.7
  Top Layer w30: J?.1@136.81,450 279,450 ; J?.1@152.01,664.8 190.2,664.8 225,630 225,504 279,450 ; U4.8@330,399 279,450
  Bottom Layer w10: pad.3@50,804 pad.3@50,821 ; J?.1@120.61,696.2 J?.1@136.81,680 ; J?.1@135,450 J?.1@136.81,450 ; U6.3@1019.45,489.09 U6.3
  Bottom Layer w15: v1(865,345) 955.39,345 C7.2 990.39,460.04 U6.3@1019.45,489.09
  Bottom Layer w30: J?.1@120.61,696.2 120.61,733.39 50,804 50,535 J?.1@135,450
pads on no net: J?. J?.A5 J?.A8 J?.B5 J?.B8 LS?.1 LS?.2 U1.4 U1.9 U1.10 U1.11 U1.15 U1.16 U1.22 U1.23 U1.26 U1.28 U1.29 U1.30 U1.31 U1.33 U1.34 U1.35 U1.36 U1.37 U2.1 U2.2 U2.5 U2.12 U2.13 U2.16 U3.6 U4.2 U4.3 U4.4 U4.6 U7.5 U7.7
copper on no net: | length 49.5
  Bottom Layer w10: 1100,89 1135,54

## Polygon pours and split planes (outlines as drawn)
GND on Plane (GND) "GND Plane" (solid, pour order 2): 0,1220 1480,1220 1480,130 0,130
VCC on Plane (VCC) "Power Plane" (solid, pour order 4): 0,1220 1480,1220 1480,130 0,130 0,855

## Silkscreen, mask and mechanical layers (free items; w line width, h text height)
Top Overlay:
  drawing of 4 lines, arcs and shapes, not listed
  text "X" at 1193,1198 h20
  text "Y" at 1303,1198 h20
  text "VCC" at 1393,1198 h20
  text "RST" at 60,845 h30
  text "GND" at 1393,828 h20
  text "PYRO 1" at 280,710 h30 r270
  text "BOOT" at 1155,560 h30 r90
  text "PYRO 2" at 280,485 h30 r270
  text "JLCJLCJLCJLC" at 70,315 h30 r90
Bottom Overlay:
  text "GND" at 125,1045 h30 r270
  text "BAT" at 125,790 h30 r270
  text "SDA" at 1360,705 h30 r90
  text "SCL" at 1360,560 h30 r90
  text "3V3" at 1360,445 h30 r90
  text "GND" at 1360,340 h30 r90
  text "IO15" at 395,125 h30
  text "5V" at 495,125 h30
  text "GND" at 700,125 h30
  text "GND" at 860,125 h30
  text "5V" at 1035,125 h30
  text "IO7" at 1165,125 h30
Board:
  the board outline again, w10

## Text inside footprints (layer, text, board x,y; h text height)
J?: Mechanical 13 "PCB EDGE" at 952.6,14.76 h16
LS?: Mechanical 13 "+" at 1060,886.5 h32 r270; Mechanical 13 "-" at 835,894.37 h32 r270; Bottom Overlay "-" at 835,894.37 h32 r270; Bottom Overlay "+" at 1060,886.5 h32 r270
U1: Mechanical 13 "ANTENNA" at 562.83,1356.14 h50
U7: Mechanical 13 "*" at 279.5,844.5 h50 r90; Bottom Overlay "*" at 237,902.5 h50 r90